# EAGLE board CityFireFly_LED (EAGLE 7.5.0)
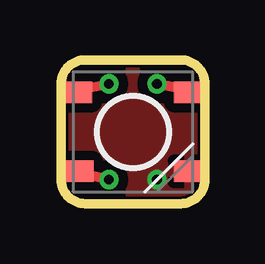
[diagram p0: board, top side]
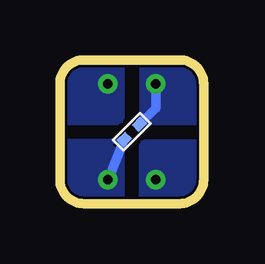
[diagram p1: board, bottom side, seen from below]

Size 6 x 6 mm. Coordinates in mm from the lower left corner, seen from the top.
Outline: 1,0 5,0 arc90 6,1 6,5 arc90 5,6 1,6 arc90 0,5 0,1 arc90 1,0
Copper layers (1*16): Top 0.035mm / dielectric 1.5mm / Bottom 0.035mm
Design rules "tiisai yatu *": minimum track width 10mil, minimum drill 0.4mm, track to track 0.4mm, track to pad 0.4mm, pad to pad 0.4mm, via to via 0.4mm, smd to smd 0.4mm, copper to edge 0.1mm, drill to drill 8mil, minimum pad ring 10mil, minimum via ring 8mil, stop-mask expansion 4mil, vias tented up to drill 0mil, thermal gap 10mil

## Footprints (pad centres in the part's own frame; a part is rotated, then mirrored left to right if it is on the bottom)
1005 = smd 0.5 x 0.4: 1 -0.45,0; 2 0.45,0
NEO_FLAT = smd 1.3 x 0.9: 1 -2.35,1.65; 3 2.35,-1.65; 4 2.35,1.65 | smd 1.4 x 0.9: 2 -2.35,-1.65

## Placement (x,y rotation side)
C1  1uF  [1005]  3,3 225 bottom
LED1  NEO_FLAT  [NEO_FLAT]  3,3 0 top

## Library data of the parts
C1 = 02_C
LED1 = 10_LED

## Nets
+5V: C1.1 LED1.1
DIN: LED1.4
DOUT: LED1.2
GND: C1.2 LED1.3

## Tracks (layer width: path | path; a pad name or v marks a point on that pad's centre or on a via)
+5V  (via drill 0.4)
  Top 0.4: LED1.1 0.5,4.7 v2,5
  Bottom 0.4: C1.1 2,4 v2,5
  pour Bottom (rank 5): -1,7 2.5,7 2.5,3.5 -1,3.5
DIN  (via drill 0.4)
  Top 0.406: LED1.4 5.5,4.7 v4,5
  pour Bottom: 3.5,7 7,7 7,3.5 3.5,3.5
DOUT  (via drill 0.4)
  Top 0.406: v2,1 0.5,1.35 LED1.2
  pour Bottom (rank 6): 2.5,2.5 -1,2.5 -1,-1 2.5,-1
GND  (via drill 0.4)
  Bottom 0.406: C1.2 v4,1
  pour Top: -1,7 7,7 7,-1 -1,-1
  pour Bottom (rank 4): 3.5,2.5 7,2.5 7,-1 3.5,-1